# Altium PCB Main.PcbDoc
Units mm, origin at the board's own origin, x right, y up, seen from the top; angles counter-clockwise.
Board outline 152.4 x 101.6 mm, 2 copper layers (Top Layer, Bottom Layer); 21 components, 10 nets, 95 pads, 5 vias.
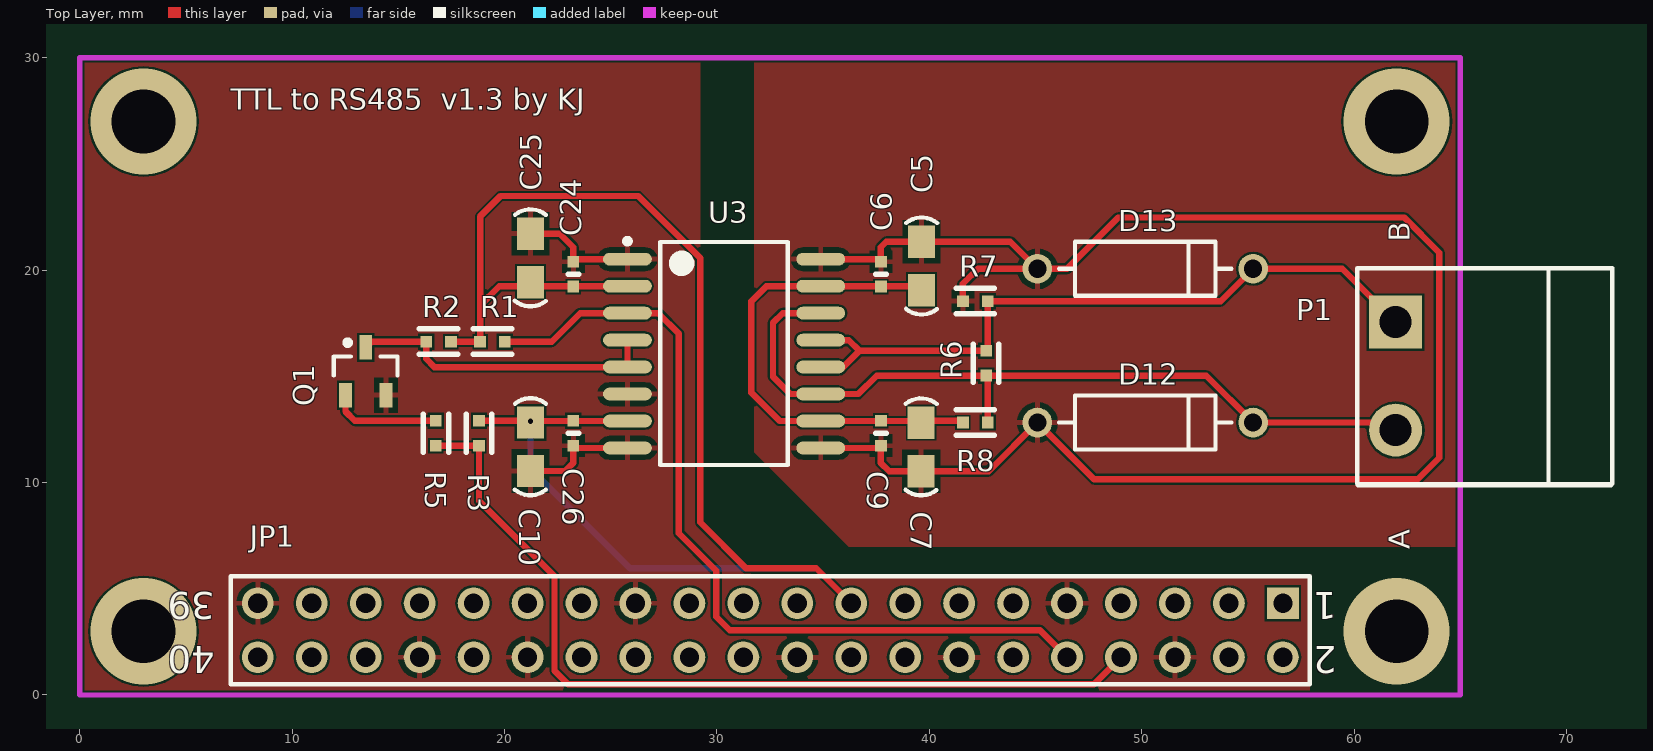
[diagram p0: Top Layer view]
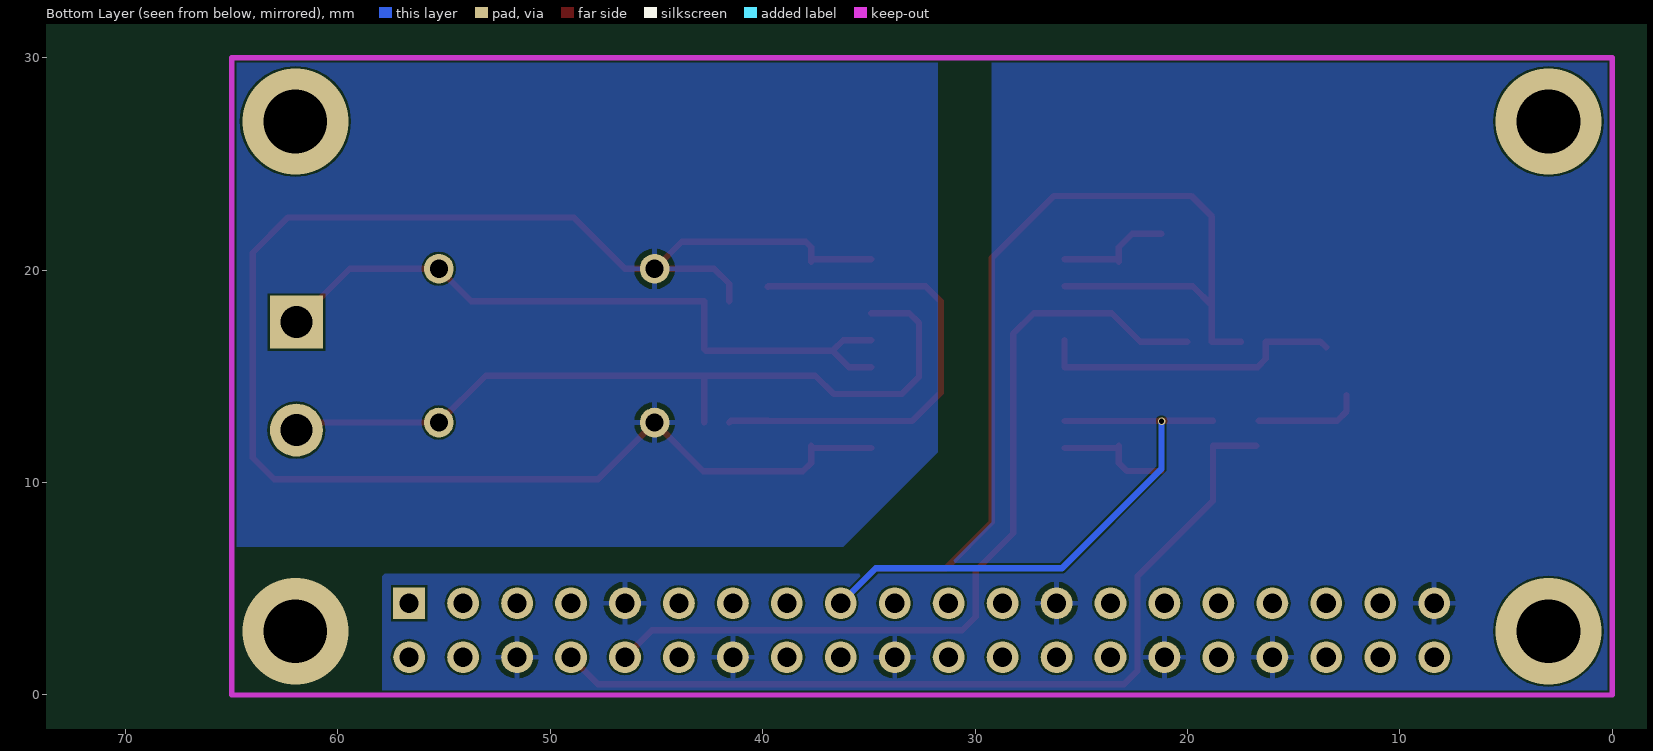
[diagram p1: Bottom Layer view, seen from below]
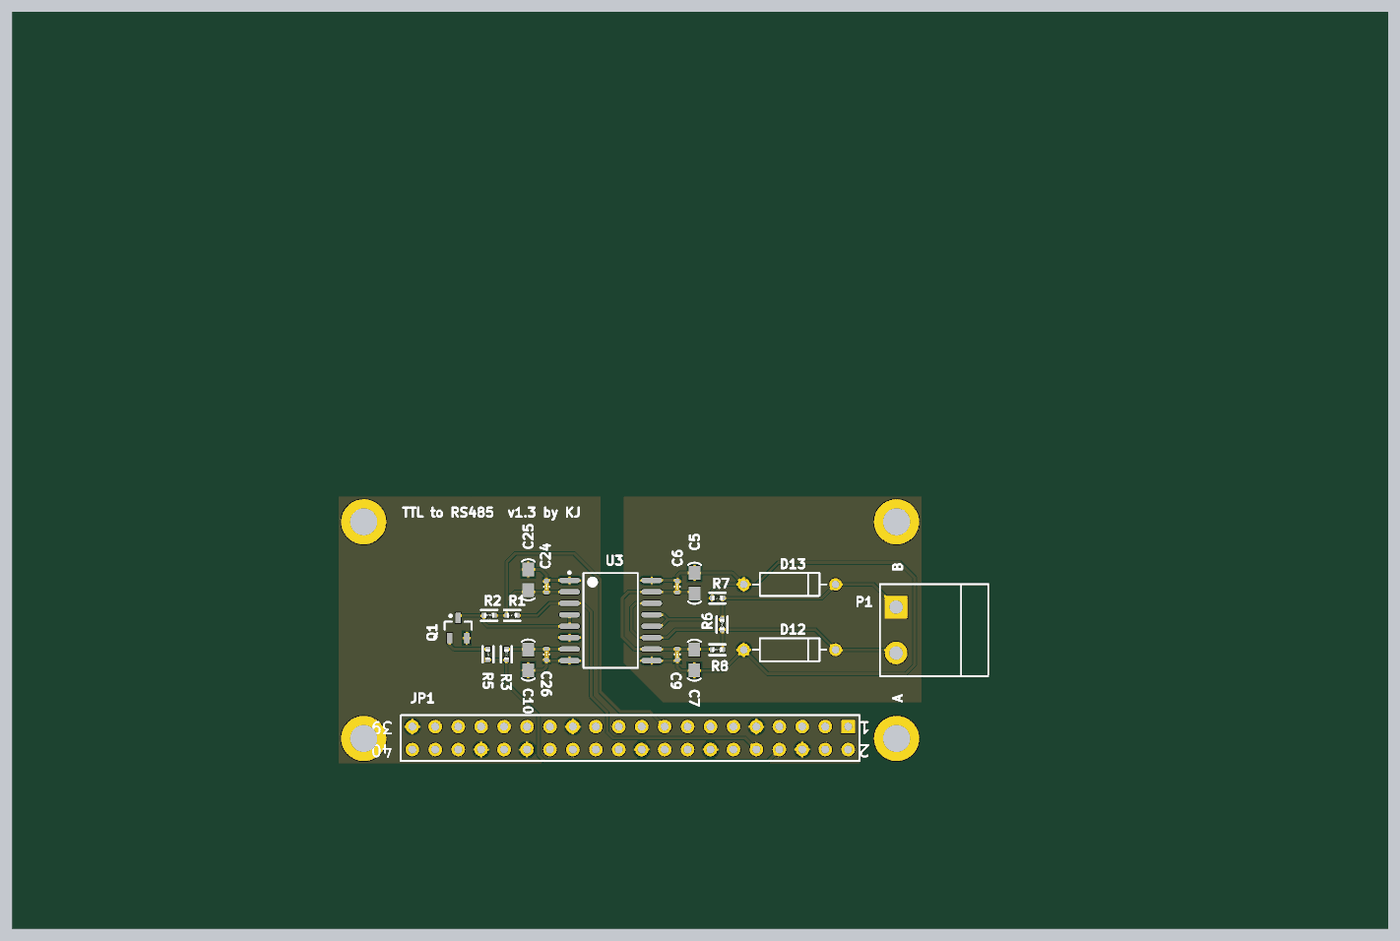
[diagram p2: 3D render of the assembled board from above, using the file's embedded part models]

## Layer stack, top to bottom
Top Solder: solder mask 0.0102, Solder Resist, Dk 3.5
Top Layer: signal copper 0.0356
Dielectric 1: dielectric 0.32, FR-4, Dk 4.8
Bottom Layer: signal copper 0.0356
Bottom Solder: solder mask 0.0102, Solder Resist, Dk 3.5

## Board outline
-35.937,-18.09 116.463,-18.09 116.463,83.51 -35.937,83.51

## Design rules (kind name [scope] priority, off if disabled: settings)
Clearance [All] p1: gap=0.1 ignorepadtopadclearanceinfootprint=FALSE
PolygonConnect [All] p1: connectstyle=Relief reliefconductorwidth=0.254 reliefentries=4 polygonreliefangle="90 Angle" airgapwidth=0.254
RoutingVias [All] p1: holewidth=0.711 width=1.27 viastyle="Through Hole" minholewidth=0.711 minwidth=1.27 maxholewidth=0.711 maxwidth=1.27
SolderMaskExpansion [All] p1: expansion=0.102
Width [All] p1: maxlimit=1 minlimit=0.2 preferedwidth=0.254 minimp=50.000000 maximp=50.000000 favimp=50.000000
30 further rules are at their usual default settings.

## Components (designator, comment, footprint, x,y, rotation, side; value= is the part's Value field where it differs from the comment)
C5 "Cap Semi" 0805_C 39.624,21.336 r270 top value=10uF
C6 "Cap Semi" SMD-0402C 37.719,19.812 r0 top value=100nF
C7 "Cap Semi" 0805_C 39.624,10.541 r90 top value=10uF
C9 "Cap Semi" SMD-0402C 37.719,12.319 r180 top value=100nF
C10 "Cap Semi" 0805_C 21.209,12.827 r270 top value=10uF
C24 "Cap Semi" SMD-0402C 23.241,19.812 r180 top value=100nF
C25 "Cap Semi" 0805_C 21.209,21.717 r270 top value=10uF
C26 "Cap Semi" SMD-0402C 23.241,12.319 r0 top value=100nF
D12 "P6KE6.8CA" DIODE-0.4 50.165,12.827 r0 top
D13 "P6KE6.8CA" DIODE-0.4 50.165,20.066 r0 top
JP1 "HEADER 20X2" HDR2X20 56.642,4.318 r180 top
P1 "Header 2" 歐式端子*2p 61.976,17.526 r270 top
Q1 "2N3904" SOT23_N 13.462,15.24 r90 top
R1 "Res Semi" SMD-0402-RES 19.431,16.637 r270 top value=10K
R2 "Res Semi" SMD-0402-RES 16.891,16.637 r90 top value=10K
R3 "Res Semi" SMD-0402-RES 18.796,12.319 r0 top value=1K
R5 "Res Semi" SMD-0402-RES 16.764,12.319 r0 top value=1K
R6 "Res2" SMD-0402-RES 42.672,15.621 r0 top value=120
R7 "Res2" SMD-0402-RES 42.164,18.542 r270 top value=10k
R8 "Res2" SMD-0402-RES 42.164,12.827 r90 top value=10k
U3 "ADM2682E" SOIC127P1030-16N 30.335,16.073 r0 top

## Footprints (in the part's own frame and the unit in brackets; to place one, negate y for a bottom-side part, rotate by r counter-clockwise, add the part's x,y. Pads: shape width x height; smd on the part's side, far side on the other; paste and mask are expansions set on the pad)
0805_C [mil]
  rect 60x50 smd: 1(-0.16,0.4) 2(89.84,0.4)
  silkscreen extent -45,-28 135,29
DIODE-0.4 [mm] "Diode, Thru-Hole; 2 Leads; 0.4 in Pin Spacing"
  round 1.4 hole 0.85: 1(-5.08,0) 2(5.08,0)
  silkscreen extent -4.06,-1.27 4.06,1.27
HDR2X20 [mm] "Connector; Header; 20x2 Position"
  rect 1.5x1.5 hole 0.9: 1(0,0)
  round 1.5 hole 0.9: 2(0,2.54) 3(2.54,0) 4(2.54,2.54) 5(5.08,0) 6(5.08,2.54) 7(7.62,0) 8(7.62,2.54) 9(10.16,0) 10(10.16,2.54) 11(12.7,0) 12(12.7,2.54) 13(15.24,0) 14(15.24,2.54) 15(17.78,0) 16(17.78,2.54) 17(20.32,0) 18(20.32,2.54) 19(22.86,0) 20(22.86,2.54) 21(25.4,0) 22(25.4,2.54) 23(27.94,0) 24(27.94,2.54) 25(30.48,0) 26(30.48,2.54) 27(33.02,0) 28(33.02,2.54) 29(35.56,0) 30(35.56,2.54) 31(38.1,0) 32(38.1,2.54) 33(40.64,0) 34(40.64,2.54) 35(43.18,0) 36(43.18,2.54) 37(45.72,0) 38(45.72,2.54) 39(48.26,0) 40(48.26,2.54)
  silkscreen extent -1.27,-1.27 49.53,3.81
SMD-0402-RES [mm]
  rect 0.55x0.55 smd: 1(0,0.584) 2(0,-0.584)
  silkscreen extent -0.6,-0.9 0.6,0.9, body extent -0.28,-0.57 0.27,0.58, height 0.41
SMD-0402C [mm]
  rect 0.55x0.55 smd: 1(0,0.584) 2(0,-0.584)
  silkscreen extent -0.25,0 0.25,0, body extent -0.25,-0.51 0.25,0.51, height 0.51
SOIC127P1030-16N [mm] "SOIC, 16-Leads, Body 10.3x7.5mm, Pitch 1.27mm, IPC Medium Density"
  oval 2.3x0.6 smd: 1(-4.55,4.445) 2(-4.55,3.175) 3(-4.55,1.905) 4(-4.55,0.635) 5(-4.55,-0.635) 6(-4.55,-1.905) 7(-4.55,-3.175) 8(-4.55,-4.445) 9(4.55,-4.445) 10(4.55,-3.175) 11(4.55,-1.905) 12(4.55,-0.635) 13(4.55,0.635) 14(4.55,1.905) 15(4.55,3.175) 16(4.55,4.445)
  silkscreen extent -4.67,-5.25 3,5.42, body extent -3.75,-5.25 3.75,5.25, height 2.65
SOT23_N [mm] "SOT23, 3-Leads, Body 2.9x1.3mm, Pitch 0.95mm, Lead Span 2.3mm - Reverse Pinning, IPC Medium Density"
  rect 1.15x0.6 smd: 1(1.125,0) 2(-1.125,-0.95) 3(-1.125,0.95)
  silkscreen extent -0.2,-1.5 1.47,1.5, body extent -0.7,-1.5 0.7,1.5, height 1.1
歐式端子*2p [mm]
  rect 2.5x2.5 hole 1.5: 1(-0.025,-0.025)
  round 2.5 hole 1.5: 2(5.055,-0.025)
  silkscreen extent -2.58,-1.83 7.62,10.17

## Part data
C5 C7 C10 C25: "Cap-10uF", LatestRevisionDate=29-May-2009, LatestRevisionNote="IPC-7351 Footprint Added.", PackageDescription="Chip Capacitor", PackageReference=C1206, Published=8-Jun-2000, Publisher="Altium Limited"
C6 C9 C24 C26: "Cap-0.1uF", LatestRevisionDate=29-May-2009, LatestRevisionNote="IPC-7351 Footprint Added.", PackageDescription="Chip Capacitor", PackageReference=C1206, Published=8-Jun-2000, Publisher="Altium Limited"
D12 D13: library part "D Zener", "Zener Diode", LatestRevisionDate=17-Jul-2002, LatestRevisionNote="Re-released for DXP Platform.", PackageReference=DIODE-0.7, Published=8-Jun-2000, Publisher="Altium Limited"
P1: "Header, 2-Pin", LatestRevisionDate=17-Jul-2002, LatestRevisionNote="Re-released for DXP Platform.", Publisher="Altium Limited"
Q1: "NPN General Purpose Amplifier", Code_JEDEC=TO-92A, ComponentLink1Description="Manufacturer Link", ComponentLink1URL=http://www.fairchildsemi.com/, ComponentLink2Description=Datasheet, ComponentLink2URL=http://www.fairchildsemi.com/ds/2N%2F2N3904.pdf, DatasheetVersion=1997, LatestRevisionDate=15-Jan-2003, LatestRevisionNote="PCB Footprint 'BCY-W3/D4.7' replaced", PackageReference=TO-92A, PackageVersion=Sep-1998, Published=8-Jun-2000, Publisher="Altium Limited"
R1 R2 R7 R8: "Res-10k", LatestRevisionDate=17-Jul-2002, LatestRevisionNote="Re-released for DXP Platform.", Published=8-Jun-2000, Publisher="Altium Limited"
  R1 R2: PackageReference=AXIAL-0.5
  R7 R8: PackageReference=AXIAL-0.4
R3 R5: "Res-1k", LatestRevisionDate=17-Jul-2002, LatestRevisionNote="Re-released for DXP Platform.", PackageReference=AXIAL-0.5, Published=8-Jun-2000, Publisher="Altium Limited"
R6: "Res-120", LatestRevisionDate=17-Jul-2002, LatestRevisionNote="Re-released for DXP Platform.", PackageReference=AXIAL-0.4, Published=8-Jun-2000, Publisher="Altium Limited"
U3: "isolation RS422 with isolated power"

## Via types
v1: diameter 5, hole 3, Top Layer to Bottom Layer, 4 vias
v2: diameter 0.356, hole 0.254, Top Layer to Bottom Layer, tented both sides, 1 vias

## Nets (pads, with @x,y where several pads share a name; then routed paths per layer and width w, separated by ;. In a path a pad name is that pad's centre, name@x,y a point inside that pad or via, vN(x,y) a via of type N, cw(c..) or ccw(c..) an arc to the next point about the centre after c; other vN are vias at no path point)
GND: C10.2 C24.2 C25.1 C26.2 JP1.6 JP1.9 JP1.14 JP1.20 JP1.25 JP1.30 JP1.34 JP1.39 Q1.2 U3.1 U3.6 U3.8 | length 10.8
  Top Layer w0.3: C10.2 22.864,10.545 23.241,10.922 C26.2 ; C25.1 22.602,21.721 23.241,21.082 C24.2 ; C26.2@23.348,11.628 U3.8 ; C24.2@23.363,20.518 U3.1
GND1: C5.1 C6.1 C7.1 C9.1 D12.1 D13.1 R7.2 U3.9 U3.16 | length 78.9
  Top Layer w0.3: U3.9 C9.1@37.612,11.628 ; U3.16 37.597,20.518 C6.1 37.719,21.082 37.977,21.34 C5.1 43.811,21.34 D13.1 ; C9.1 37.719,10.922 38.104,10.537 C7.1 42.795,10.537 D12.1 47.752,10.16 62.992,10.16 64.008,11.176 64.008,20.828 62.357,22.479 48.895,22.479 46.482,20.066 D13.1 ; R7.2 41.58,19.355 42.291,20.066 D13.1
NetQ1_1: Q1.1 R2.1 U3.4 U3.5 | length 14.7
  Top Layer w0.3: Q1.1 13.734,16.637 R2.1 16.307,15.824 16.693,15.438 U3.5 U3.4
NetQ1_3: Q1.3 R5.1 | length 5.1
  Top Layer w0.3: Q1.3 12.512,13.345 12.954,12.903 R5.1@16.637,12.903
RxD+_1: D12.2 P1.2 R6.2 R8.2 U3.11 U3.14 | length 38.8
  Top Layer w0.3: U3.14 33.091,17.978 32.639,17.526 32.639,14.986 33.457,14.168 U3.11 36.647,14.168 37.516,15.037 R6.2 ; R8.2 42.748,14.961 R6.2 ; D12.2@55.601,12.471 D12.2 ; P1.2 61.595,12.827 D12.2 ; R6.2 53.035,15.037 D12.2
RxD-_1: D13.2 P1.1 R6.1 R7.1 U3.12 U3.13 | length 33.4
  Top Layer w0.3: U3.12 35.941,15.438 36.708,16.205 ; U3.13 36.205,16.708 36.708,16.205 ; P1.1 59.436,20.066 D13.2 53.721,18.542 R7.1 42.748,16.281 R6.1 36.708,16.205
TTL_RXD: JP1.10 R1.1 U3.3 | length 40.5
  Top Layer w0.3: R1.1 22.225,16.637 23.566,17.978 U3.3 27.234,17.978 28.194,17.018 28.194,7.62 29.972,5.842 29.972,3.683 30.607,3.048 45.212,3.048 JP1.10
TTL_TXD: JP1.8 R3.2 R5.2 | length 41.6
  Top Layer w0.3: R5.2 R3.2 18.796,9.144 22.352,5.588 22.352,1.143 22.987,0.508 47.752,0.508 JP1.8
VCC: C10.1 C24.1 C25.2 C26.1 JP1.17 R1.2 R2.2 R3.1 U3.2 U3.7 | length 74.6
  Top Layer w0.3: R2.2 R1.2 18.847,18.339 ; R3.1 21.331,12.903 21.336,12.898 U3.7 ; U3.2 19.756,19.248 18.847,18.339 ; JP1.17 34.671,5.969 31.369,5.969 29.21,8.128 29.21,20.574 26.289,23.495 19.812,23.495 18.847,22.53 18.847,18.339
  Bottom Layer w0.3: v2(21.219,12.89) 21.219,10.658 25.908,5.969 34.671,5.969 JP1.17
Viso_1: C5.2 C6.2 C7.2 C9.2 R8.1 U3.10 U3.15 | length 25
  Top Layer w0.3: C7.2@39.751,12.903 41.504,12.903 R8.1@41.509,12.898 ; C5.2@39.751,19.228 39.731,19.248 U3.15 32.329,19.248 31.623,18.542 31.623,14.224 32.949,12.898 U3.10 R8.1@41.509,12.898 ; R8.1 R8.1@41.509,12.898
pads on no net: JP1.1 JP1.2 JP1.3 JP1.4 JP1.5 JP1.7 JP1.11 JP1.12 JP1.13 JP1.15 JP1.16 JP1.18 JP1.19 JP1.21 JP1.22 JP1.23 JP1.24 JP1.26 JP1.27 JP1.28 JP1.29 JP1.31 JP1.32 JP1.33 JP1.35 JP1.36 JP1.37 JP1.38 JP1.40
copper on no net:
  other v1: 3,3 62,3 3,27 62,27

## Polygon pours and split planes (outlines as drawn)
GND1 on Bottom Layer "Bottom Layer-GND1" (solid, pour order 2): 31.762,30 31.762,11.43 36.207,6.985 65.012,6.985 65.012,30
GND on Bottom Layer "Bottom Layer-GND" (solid, pour order 20): 0,30 29.21,30 29.21,8.128 31.623,5.715 57.785,5.715 57.912,5.588 57.912,0 0,0
GND1 on Bottom Layer "Bottom Layer-GND1 1" (solid, pour order 0): 31.75,30
GND on Top Layer "Top Layer-GND" (solid, pour order 18): 0,29.972 29.21,29.972 29.21,8.1 31.623,5.687 57.785,5.687 57.912,5.56 57.912,-0.028 0,-0.028
GND1 on Top Layer "Top Layer-GND1" (solid, pour order 4): 31.762,30 31.762,11.43 36.207,6.985 65.012,6.985 65.012,30

## Keep-outs
Keep-Out Layer:
  lines w0.254: 0,0 65,0 65,30 0,30 0,0

## Silkscreen, mask and mechanical layers (free items; w line width, h text height)
Top Overlay:
  text "TTL to RS485  v1.3 by KJ" at 7.112,27.559 h1
  text "B" at 62.611,21.336 h1 r90
  text "A" at 62.611,6.858 h1 r90

## Text inside footprints (layer, text, board x,y; h text height)
JP1: Top Overlay "1" at 59.182,4.826 h1.27 r180; Top Overlay "2" at 59.182,2.286 h1.27 r180; Top Overlay "40" at 6.35,2.286 h1.27 r180; Top Overlay "39" at 6.35,4.826 h1.27 r180